# EAGLE board OpenDoorSystem_Electronic (EAGLE 9.7.0)

Size 289.78 x 191.42 mm. Coordinates in mm from the lower left corner, seen from the top.
Outline: 0,0 289.78,0 289.78,191.42 0,191.42 0,0
Copper layers (1*16): Top 0.035mm / dielectric 1.5mm / Bottom 0.035mm
Design rules "default": minimum track width 6mil, minimum drill 0.35mm, track to track 6mil, track to pad 6mil, pad to pad 6mil, via to via 6mil, smd to smd 6mil, copper to edge 40mil, drill to drill 6mil, minimum pad ring 10mil, minimum via ring 8mil, stop-mask expansion 4mil, vias tented up to drill 0mil, thermal gap 10mil

## Footprints (pad centres in the part's own frame; a part is rotated, then mirrored left to right if it is on the bottom)
1X08 = drill 1.016 long: 1 -8.89,0; 2 -6.35,0; 3 -3.81,0; 4 -1.27,0; 5 1.27,0; 6 3.81,0; 7 6.35,0; 8 8.89,0
PIEZO = drill 1 pad 1.6: 1 -3.5,0; 2 3.5,0
RESAD1016W63L850D250B = drill 0.83 pad 1.43: 1 -5.08,0; 2 5.08,0
SG90 = drill 1.016 long: 1 -2.54,0; 2 0,0; 3 2.54,0
TO220BV = drill 1.016 long: D 0,-2.54; G -2.54,-2.54; S 2.54,-2.54
ARDUINO-UNO-R3-SHIELD = drill 1.016 pad 1.88: 3.3V 24.13,-2.54; 5V 24.13,0; A0 24.13,12.7; A1 24.13,15.24; A2 24.13,17.78; A3 24.13,20.32; A4 24.13,22.86; A5 24.13,25.4; AREF -24.13,-13.97; D2 -24.13,20.32; D3 -24.13,17.78; D4 -24.13,15.24; D5 -24.13,12.7; D6 -24.13,10.16; D7 -24.13,7.62; D8 -24.13,3.81; D9 -24.13,1.27; D10 -24.13,-1.27; D11 -24.13,-3.81; D12 -24.13,-6.35; D13 -24.13,-8.89; GND@0 24.13,2.54; GND@1 24.13,5.08; GND@2 -24.13,-11.43; IOREF 24.13,-7.62; NC 24.13,-10.16; RES 24.13,-5.08; RX -24.13,25.4; SCL -24.13,-19.05; SDA -24.13,-16.51; TX -24.13,22.86; VIN 24.13,7.62
LCD-I2C = drill 1.016 long: 1 -19.05,-5.08; 2 -19.05,-7.62; 3 -19.05,-10.16; 4 -19.05,-12.7

## Placement (x,y rotation side)
KEYPAD1  KEYPAD-4X4  [1X08]  253.06,35.72 0 top
PIEZO1  PIEZO  [PIEZO]  196.38,51.45 0 top
R1  10k  [RESAD1016W63L850D250B]  190.1,98.61 270 top
R3  4k  [RESAD1016W63L850D250B]  124.06,98.61 90 top
SERVO1  SERVOSG90  [SG90]  67.28,7.06 90 top
T2  NMOSFET  [TO220BV]  124.06,124.01 0 top
U1  ARDUINO-UNO-R3-SHIELD  [ARDUINO-UNO-R3-SHIELD]  29.84,68.31 180 top
U2  LCD-16X2-I2CSUNFOUNDER-IIC  [LCD-I2C]  234.15,183.82 0 top
U3  LCD-16X2-I2CSUNFOUNDER-IIC  [LCD-I2C]  148.35,183.88 0 top

## Library data of the parts
KEYPAD1 PIEZO1 R1 R3 SERVO1 U1-U3 = Tinkercad
T2 = Tinkercad; CATEGORY: Transistor; SUB-CATEGORY: MOSFET; TYPE: N-Channel

## Nets
SERVO1_GND: R3.1 R3.2 SERVO1.1 T2.D
U1_5V: SERVO1.2 U1.5V U2.2 U3.2
U1_A2: PIEZO1.1 U1.A2
U1_A4: U1.A4 U2.3 U3.3
U1_A5: U1.A5 U2.4 U3.4
U1_D2: KEYPAD1.8 U1.D2
U1_D3: KEYPAD1.7 U1.D3
U1_D4: KEYPAD1.6 U1.D4
U1_D5: KEYPAD1.5 U1.D5
U1_D6: KEYPAD1.4 U1.D6
U1_D7: KEYPAD1.3 U1.D7
U1_D8: KEYPAD1.2 U1.D8
U1_D9: KEYPAD1.1 U1.D9
U1_D10: T2.G U1.D10
U1_D11: SERVO1.3 U1.D11
U1_GND: PIEZO1.2 R1.1 R1.2 T2.S U1.GND@0 U1.GND@1 U1.GND@2 U2.1 U3.1

## Tracks (layer width: path | path; a pad name or v marks a point on that pad's centre or on a via)
SERVO1_GND  (3 unrouted)
U1_5V  (3 unrouted)
U1_A2  (1 unrouted)
U1_A4  (2 unrouted)
U1_A5  (2 unrouted)
U1_D2  (1 unrouted)
U1_D3  (1 unrouted)
U1_D4  (1 unrouted)
U1_D5  (1 unrouted)
U1_D6  (1 unrouted)
U1_D7  (1 unrouted)
U1_D8  (1 unrouted)
U1_D9  (1 unrouted)
U1_D10  (1 unrouted)
U1_D11  (1 unrouted)
U1_GND  (8 unrouted)